# EAGLE board RoverMux (EAGLE 6.4)
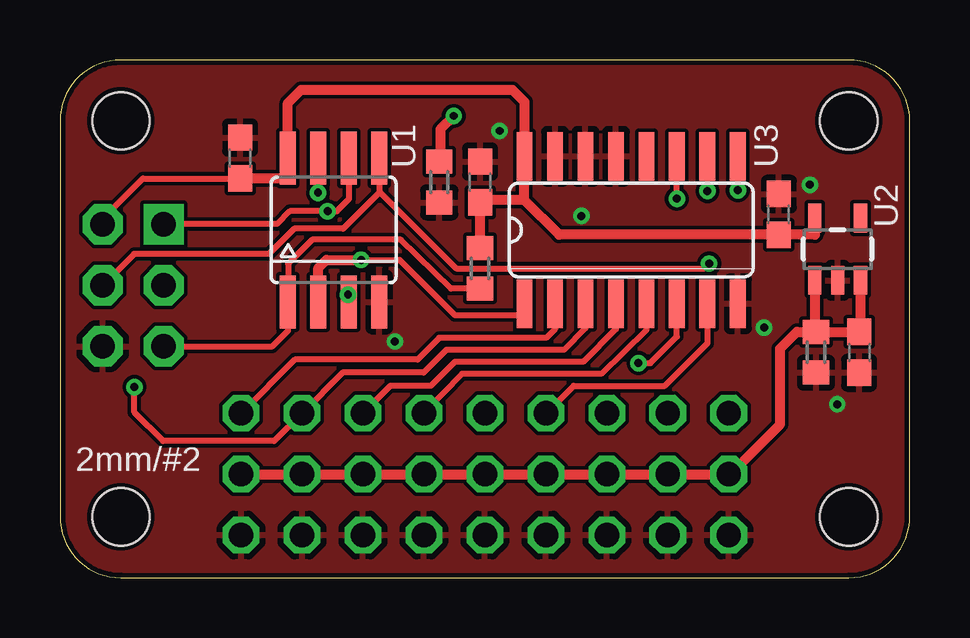
[diagram p0: board, top side]
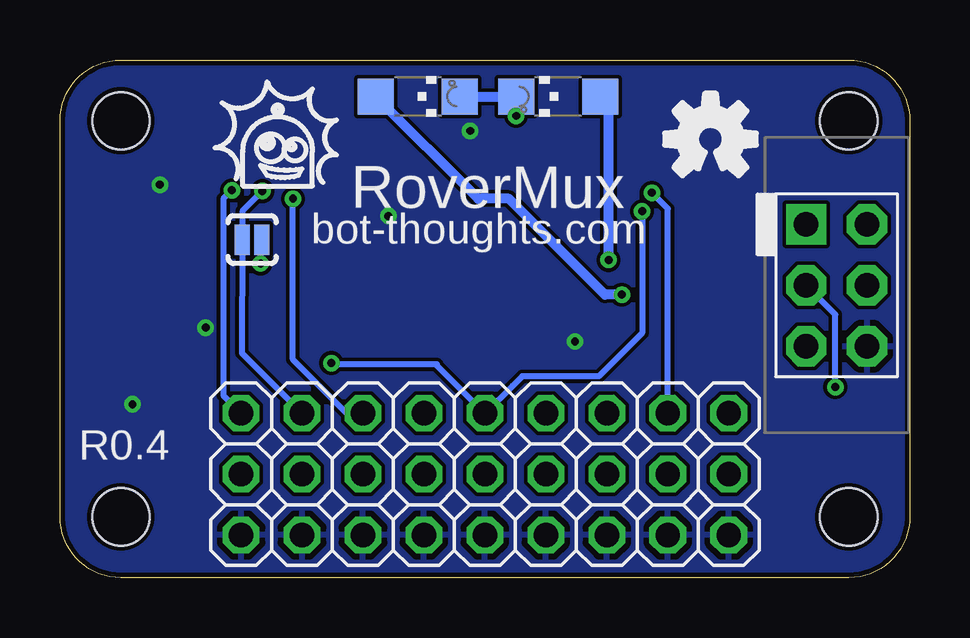
[diagram p1: board, bottom side, seen from below]

Size 35.41 x 21.59 mm. Coordinates in mm from the lower left corner, seen from the top.
Outline: 32.87,21.59 2.54,21.59 arc90 0,19.05 0,2.54 arc90 2.54,0 32.87,0 arc90 35.41,2.54 35.41,19.05 arc90 32.87,21.59
Copper layers (1*16): Top 0.0356mm / dielectric 1.5011mm / Bottom 0.0356mm
Design rules "LaenPCBOrder *": minimum track width 6mil, minimum drill 13mil, track to track 6mil, track to pad 6mil, pad to pad 6mil, via to via 6mil, smd to smd 6mil, copper to edge 8mil, drill to drill 6mil, minimum pad ring 7mil, minimum via ring 7mil, stop-mask expansion 4mil, vias tented up to drill 20mil, thermal gap 10mil
Holes 2.39 mm at 32.87,2.54 32.87,19.05 2.54,2.54 2.54,19.05

## Footprints (pad centres in the part's own frame; a part is rotated, then mirrored left to right if it is on the bottom)
C0603 = smd 1.1 x 1: 1 -0.85,0; 2 0.85,0
CON6P2R = drill 1.016 pad 1.676 square: 1 -2.54,-1.27 | drill 1.016 pad 1.676 octagon: 2 -2.54,1.27; 3 0,-1.27; 4 0,1.27; 5 2.54,-1.27; 6 2.54,1.27
1X03-S = drill 1.016 octagon: 1 -2.54,0; 2 0,0; 3 2.54,0
CHIPLED_1206 = smd 1.5 x 1.5: A 0,-1.75; C 0,1.75
R0603 = smd 1 x 1.1: 1 -0.85,0; 2 0.85,0
SJ_2S-NOTRACE = smd 0.635 x 1.27: 1 -0.401,0; 2 0.413,0
SOIC8 = smd 0.66 x 2.2: 1 -1.905,-3; 2 -0.635,-3; 3 0.635,-3; 4 1.905,-3; 5 1.905,3; 6 0.635,3; 7 -0.635,3; 8 -1.905,3
SOT23-5 = smd 0.55 x 1.2: 1 -0.95,-1.3; 2 0,-1.3; 3 0.95,-1.3; 4 0.95,1.3; 5 -0.95,1.3
SO16 = smd 0.66 x 2.032: 1 -4.445,-3.073; 2 -3.175,-3.073; 3 -1.905,-3.073; 4 -0.635,-3.073; 5 0.635,-3.073; 6 1.905,-3.073; 7 3.175,-3.073; 8 4.445,-3.073; 9 4.445,3.073; 10 3.175,3.073; 11 1.905,3.073; 12 0.635,3.073; 13 -0.635,3.073; 14 -1.905,3.073; 15 -3.175,3.073; 16 -4.445,3.073

## Placement (x,y rotation side)
C2  104  [C0603]  17.5,16.5 90 top
C3  106  [C0603]  33.3,9.4 270 top
C4  104  [C0603]  7.5,17.5 90 top
C5  106  [C0603]  29.95,15.15 90 top
J1  ISP  [CON6P2R]  3.05,12.19 270 bottom
JP11  1MCU  [1X03-S]  7.54,4.32 270 bottom
JP12  2MCU  [1X03-S]  15.16,4.32 270 bottom
JP13  3MCU  [1X03-S]  22.78,4.32 270 bottom
JP21  1R/C  [1X03-S]  10.08,4.32 270 bottom
JP22  2R/C  [1X03-S]  17.7,4.32 270 bottom
JP23  3R/C  [1X03-S]  25.32,4.32 270 bottom
JP31  1OUT  [1X03-S]  12.62,4.32 270 bottom
JP32  2OUT  [1X03-S]  20.24,4.32 270 bottom
JP33  3OUT  [1X03-S]  27.86,4.32 270 bottom
LED1  MCU  [CHIPLED_1206]  20.5,20.07 270 bottom
LED2  R/C  [CHIPLED_1206]  14.66,20.07 90 bottom
R1  10K  [R0603]  17.5,12.9 90 top
R2  1K  [R0603]  15.8,16.5 270 top
R4  10K  [R0603]  31.5,9.4 90 top
SJ1  CH3  [SJ_2S-NOTRACE]  27.4,14.1 180 bottom
U1  TINY25/45/85-20SU  [SOIC8]  11.4,14.5 0 top
U2  MCP1824T  [SOT23-5]  32.4,13.7 0 top
U3  74HC157D  [SO16]  23.8,14.5 0 top

## Library data of the parts
C2 C4 = rcl; PARTNO: C1608X7R1E104K080AA
C3 = rcl; PARTNO: CL10A106MP8NNNC; VOLTAGE: 10V
C5 = rcl; PARTNO: CL10A106MP8NNNC
J1 U1 = bt_avr
JP11-JP13 JP21-JP23 JP31-JP33 = pinhead-2
LED1 = led; PARTNO: LH N974-KN-1
LED2 = led; PARTNO: LG N971-KN-1
R1 R4 = rcl; PARTNO: 1622829-1
R2 = rcl; PARTNO: RC0603JR-07330RL
SJ1 = SparkFun
U2 = mes_regulators; PARTNO: MCP1824T-5002E/OT
U3 = 74xx-us; PARTNO: 74HCT157D,652

## Nets
3.3V: C2.1 C4.1 C5.1 J1.2 R1.2 U1.8 U2.5 U3.16
!RESET: J1.5 R1.1 U1.1
A: LED1.A U1.3
B: LED2.A U1.2 U3.1
BEC: C3.1 JP11.2 JP12.2 JP13.2 JP21.2 JP22.2 JP23.2 JP31.2 JP32.2 JP33.2 R4.2 U2.1 U2.3
CH1MCU: JP11.1 U3.2
CH1OUT: JP31.1 U3.4
CH1RX: J1.3 JP21.1 U1.7 U3.3
CH2MCU: JP12.1 U3.5
CH2OUT: JP32.1 U3.7
CH2RX: J1.1 JP22.1 U1.6 U3.6
CH3MCU: JP13.1 U3.11
CH3OUT: JP33.1 U3.9
CH3RX: JP23.1 SJ1.2 U3.10
GND: C2.2 C3.2 C4.2 C5.2 J1.6 JP11.3 JP12.3 JP13.3 JP21.3 JP22.3 JP23.3 JP31.3 JP32.3 JP33.3 R2.2 R4.1 U1.4 U2.2 U3.8 U3.13 U3.14 U3.15
MOSI: J1.4 SJ1.1 U1.5
N$3: LED1.C LED2.C R2.1

## Tracks (layer width: path | path; a pad name or v marks a point on that pad's centre or on a via)
3.3V
  Top 0.254: J1.2 1.78,14.98 3.45,16.65 C4.1
  Top 0.406: U2.5 31.45,14.3 C5.1 20.8,14.3 19.35,15.75 | 19.35,15.75 19.35,17.15 19.36,16.86 U3.16 19.35,19.85 18.85,20.35 10.05,20.35 9.49,19.8 U1.8 9.49,16.7 9.4,16.65 C4.1 | 19.35,15.75 17.8,15.75 C2.1 R1.2
!RESET
  Top 0.254: J1.5 8.85,9.65 9.5,10.3 U1.1 9.5,13.1 10.5,14.1 14.2,14.1 16.3,12.05 R1.1
A  (via drill 0.33)
  Top 0.254: U1.3 12.04,11.79 v12,11.8
  Bottom 0.406: v12,11.8 12.7,11.8 16.7,15.8 17.98,15.8 LED1.A
B  (via drill 0.33)
  Top 0.254: v12.55,13.25 14.15,13.25 16.45,10.95 19.25,10.95 19.3,10.9 19.3,11.37 U3.1
  Top 0.406: U1.2 10.77,12.91 11.1,13.25 v12.55,13.25
  Bottom 0.406: v12.55,13.25 12.55,19.71 LED2.A
BEC
  Top 0.254: 31.27,10.18 R4.2 | 33.17,10.18 C3.1
  Top 0.406: R4.2 C3.1 33.35,10.4 U2.3 | U2.1 31.45,10.5 R4.2 | JP11.2 JP21.2 JP31.2 JP12.2 JP22.2 JP32.2 JP13.2 JP23.2 JP33.2 27.92,4.32 30,6.4 30,9.55 30.7,10.25 R4.2
CH1MCU
  Top 0.254: U3.2 20.62,10.38 20.25,10 15.8,10 14.9,9.1 9.79,9.1 JP11.1
CH1OUT
  Top 0.254: U3.4 23.16,10.37 21.8,9 16.45,9 15.45,8 13.77,8 JP31.1
CH1RX  (via drill 0.33)
  Top 0.254: v3.1,7.95 3.1,6.9 4.3,5.7 8.93,5.7 JP21.1 11.78,8.55 15.15,8.55 16.1,9.5 21,9.5 21.89,10.39 U3.3 | U1.7 10.77,16.07 v10.75,16.05
  Bottom 0.254: v3.1,7.95 3.1,10.97 J1.3 | JP21.1 10.08,15.38 v10.75,16.05
CH2MCU
  Top 0.254: U3.5 24.43,10.34 22.55,8.5 16.76,8.5 JP12.1
CH2OUT
  Top 0.254: JP32.1 20.26,6.86 21.4,8 25.2,8 26.98,9.78 U3.7
CH2RX  (via drill 0.33)
  Top 0.254: v24.1,8.95 24.6,8.95 25.7,10.05 25.7,11.4 U3.6 | U1.6 12.05,17.48 12.05,15.8 11.53,15.28 v11.15,15.28 9.58,15.28 9.05,14.75 4.34,14.75 J1.1
  Bottom 0.254: 19.75,8.9 JP22.1 16.55,8 16.15,8.4 12.95,8.4 11.15,10.2 v11.15,15.28 | 19.75,8.9 24.05,8.9 v24.1,8.95 | 19.75,8.9 19.7,8.9
CH3MCU  (via drill 0.33)
  Top 0.254: v25.7,15.8 25.7,17.55 U3.11
  Bottom 0.254: JP13.1 23.46,6.86 25.7,9.1 v25.7,15.8
CH3OUT  (via drill 0.33)
  Top 0.254: U3.9 v28.25,16.16
  Bottom 0.254: v28.25,16.16 28.6,15.8 28.6,7.59 JP33.1
CH3RX  (via drill 0.33)
  Top 0.254: U3.10 v26.98,16.12
  Bottom 0.254: JP23.1 27.83,9.36 SJ1.2 27.81,15.29 v26.98,16.12
GND  (via drill 0.33)
  other vias: 31.25,16.38 32.39,7.23 21.72,15.08 29.34,10.43 13.95,9.85 18.32,18.63
  pour Top (rank 3): 2.54,21.59 32.87,21.59 arc-90 35.41,19.05 35.41,2.54 arc-90 32.87,0 2.54,0 arc-90 0,2.54 0,19.05 arc-90
  pour Bottom: 2.54,21.59 32.87,21.59 arc-90 35.41,19.05 35.41,2.54 arc-90 32.87,0 2.54,0 arc-90 0,2.54 0,19.05 arc-90
MOSI  (via drill 0.33)
  Top 0.254: U1.5 13.3,16.09 | 13.3,16.09 16.5,12.9 26.85,12.9 v27.05,13.1 | 13.3,16.09 13.3,16.05 11.8,14.55 9.75,14.55 8.7,13.5 3.09,13.5 J1.4
  Bottom 0.254: v27.05,13.1 27.05,14.05 SJ1.1
N$3  (via drill 0.33)
  Top 0.406: v16.41,19.26 15.85,18.7 15.85,17.4 R2.1
  Bottom 0.406: LED1.C LED2.C v16.41,19.26

## Text on the board
tPlace: 2mm/#2
bNames: RoverMux | bot-thoughts.com | R0.4
tsilk: 104 | 104 | 106 | U1 | U3 | U2 | 10K | 106 | 1K | 10K | 2mm/#2
bsilk: R/C | MCU | RoverMux | BEC | bot-thoughts.com | 1OUT | 1MCU | 1R/C | 2OUT | 2MCU | 2R/C | 3OUT | 3MCU | 3R/C | 6V | 5V | ISP | R0.3